# Altium PCB DashDataDisplayPCB.PcbDoc (part 3 of 4)
Units mm, origin at the board's own origin, x right, y up, seen from the top; angles counter-clockwise.
Board outline 152.4 x 101.6 mm, 2 copper layers (Top Layer, Bottom Layer); 143 components, 97 nets, 509 pads, 233 vias.
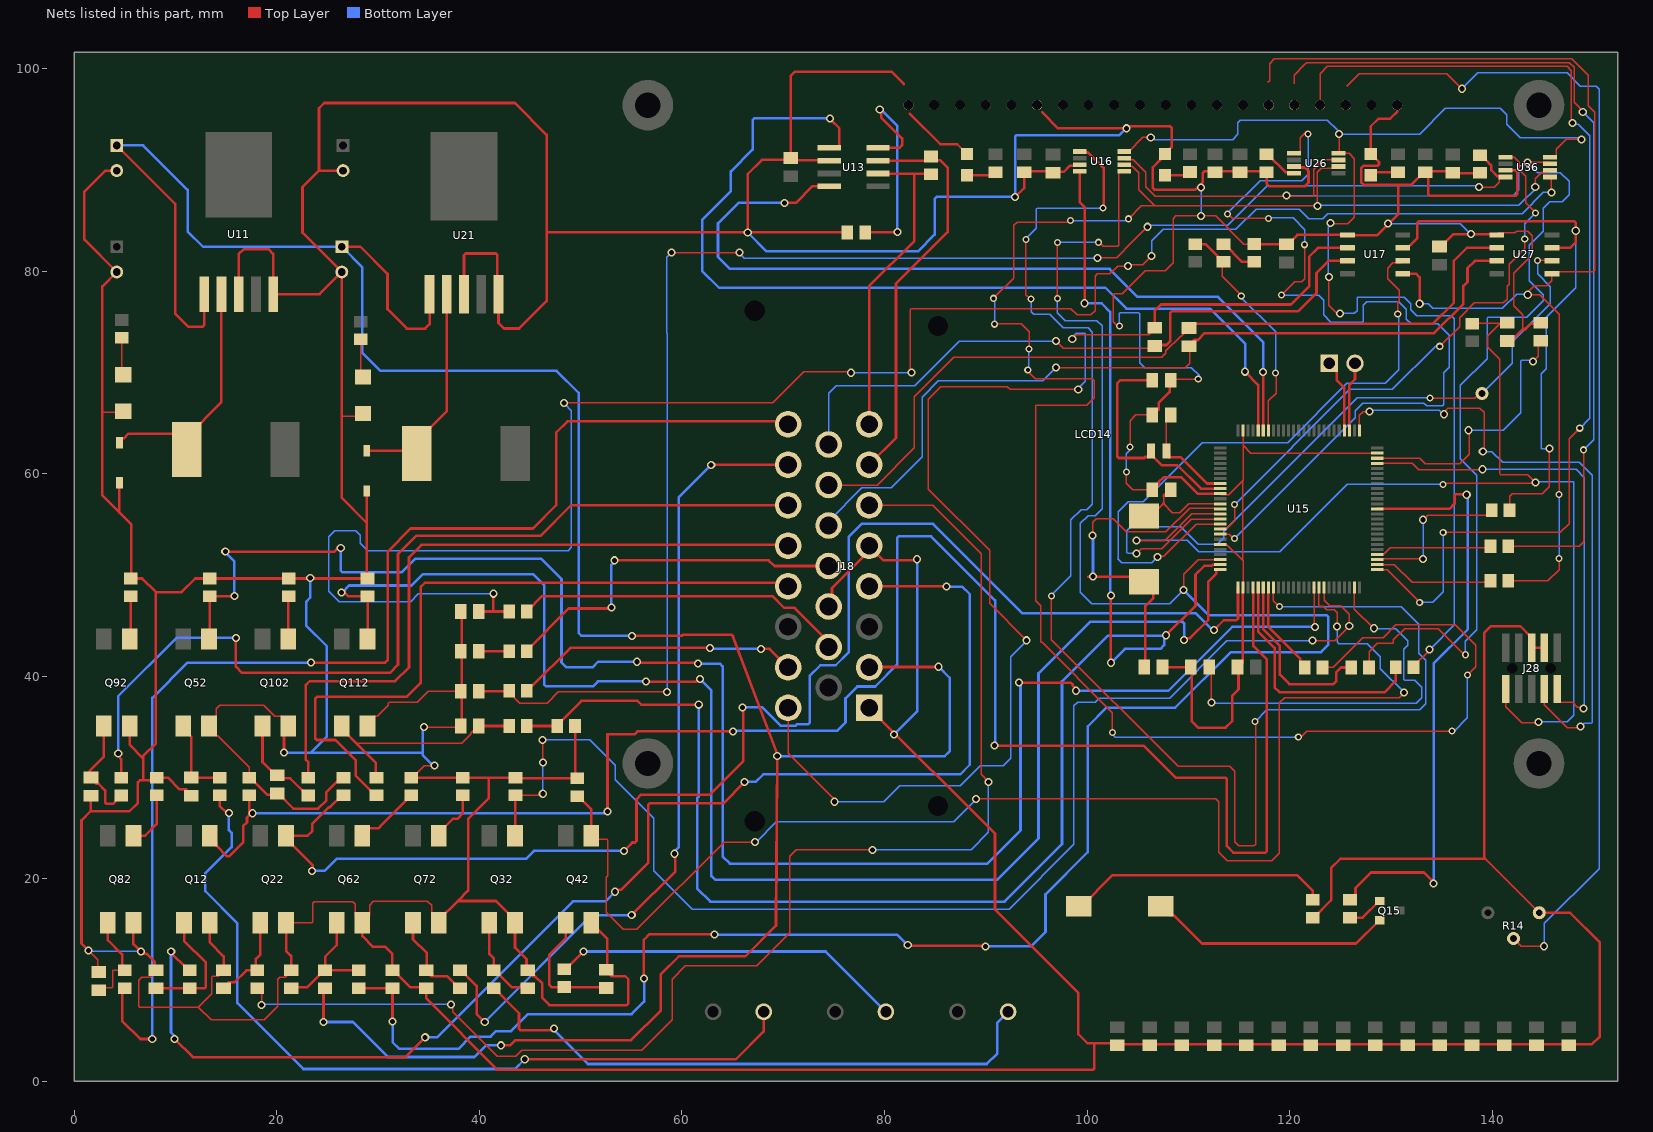
[diagram p2: the nets of this part, all layers, seen from the top]

## Via types
v1: diameter 0.8, hole 0.5, Top Layer to Bottom Layer, 177 vias
v2: diameter 0.7, hole 0.4, Top Layer to Bottom Layer, 55 vias
v3: diameter 1.27, hole 0.711, Top Layer to Bottom Layer, 1 vias

## Nets (pads, with @x,y where several pads share a name; then routed paths per layer and width w, separated by ;. In a path a pad name is that pad's centre, name@x,y a point inside that pad or via, vN(x,y) a via of type N, cw(c..) or ccw(c..) an arc to the next point about the centre after c; other vN are vias at no path point) (continued)
GND: C11.2 C12.1 C13.1 C15.1 C16.1 C17.1 C21.2 C22.1 C25.1 C26.1 C27.2 C31.2 C32.1 C35.2 C36.1 C41.2 C42.1 C45.2 C46.1 C52.1 C55.2 C56.1 C62.1 C65.1 C66.1 C72.1 C75.2 C82.1 C85.1 C92.1 C95.1 C102.1 C105.1 C112.1 C115.1 C122.1 C125.1 C132.1 C135.1 C145.1 C152.1 C155.1 C165.1 C175.1 C185.1 C195.1 C205.1 C215.2 C225.2 C235.1 D11.2 D16.2 D21.2 D26.2 D36.2 J18.1 J18.5 J18.11 J28.3 J28.5 LCD14.1 LCD14.15 LCD14.20 Q12.2 Q22.2 Q32.2 Q42.2 Q52.2 Q62.2 Q72.2 Q82.2 Q92.2 Q102.2 Q112.2 R13.2 R14.3 R45.1 R46.1 R55.1 R56.1 R92.1 R112.1 R122.1 R132.1 R142.1 R152.1 R162.1 R222.1 R252.1 R262.1 R272.1 R282.1 R292.1 U11.3 U11.5 U13.2 U15.10 U15.20 U15.27 U15.74 U15.99 U16.3 U17.1 U21.3 U21.5 U26.3 U27.1 U31.2 U36.3 U41.2 | length 1181.9
  Top Layer w0.127: v1(1.42,12.9) 2.32,12 C102.1@2.32,10.81 ; 2.77,66.05 4.91,66.05 4.94,66.08 4.91,66.08 D11.2@4.83,66.16 ; C12.1@8.069,10.871 7.482,10.284 6.674,10.284 6.37,9.98 6.37,7.394 6.444,7.32 12.26,7.32 ; C22.1@14.74,10.871 14.234,10.364 13.634,10.364 13.56,10.29 13.56,8.62 12.26,7.32 ; R112.1@17.272,29.972 17.272,30.988 14.162,34.098 14.004,34.098 13.293,34.81 Q52.2@13.293,35.07 14.004,35.782 14.004,36.804 14.34,37.14 18.712,37.14 19.795,36.057 20.413,36.057 21.124,35.345 Q102.2@21.124,35.07 ; Q22.2@20.913,15.639 23.439,15.639 23.55,15.75 23.55,17.55 23.71,17.71 27.51,17.71 27.736,17.484 27.736,16.351 Q62.2@28.448,15.639 29.159,16.351 29.159,17.399 29.54,17.78 34.85,17.78 35.272,17.358 35.272,16.351 Q72.2@35.983,15.639 ; C32.1@21.412,10.871 20.826,10.284 20.304,10.284 20.1,10.08 20.1,7.394 18.756,6.05 13.53,6.05 12.26,7.32 ; 26.4,65.67 28.23,65.67 D21.2@28.5,65.94 ; Q112.2@28.956,35.07 28.956,35.345 29.667,36.057 29.937,36.057 30.99,37.11 30.99,37.3 31.13,37.44 33.86,37.44 34.928,38.508 C82.1@38.245,38.508 ; R162.1@33.274,29.972 33.374,29.972 34.572,31.17 v1(35.58,31.17) ; v1(34.54,34.97) 38.136,34.97 C132.1@38.245,35.079 ; v2@103.07,74.51 102.61,74.97 102.61,77.676 102.684,77.75 103.47,77.75 105.77,80.05 107.73,80.05 108.51,80.83 108.51,85.18 108.78,85.45 v1(111.26,85.45) ; v2(103.88,60.17) 103.88,59.06 104.52,58.42 C215.2@106.553,58.42 ; v2(104.25,62.63) 104.25,65.21 104.826,65.786 C55.2@106.553,65.786 ; C45.2@108.153,69.215 108.278,69.34 v2(110.98,69.34) ; v1@111.26,85.46 112.688,85.46 115.482,82.666 R45.1@116.516,82.666 116.616,82.666 R45.1@117.128,83.177 ; U15.20@113.154,53.015 113.238,52.931 113.86,52.931 115.404,51.387 U15.27@115.404,48.765 ; U15.10@113.154,58.015 113.238,57.931 113.86,57.931 113.878,57.913 113.983,57.913 115.404,59.334 115.404,62.79 ; 115.38,51.411 115.38,59.31 ; U15.99@115.404,64.265 115.404,62.79 ; U15.74@128.654,62.015 116.179,62.015 115.404,62.79 ; U27.1@140.462,83.555 140.665,83.758 142.25,83.758 142.415,83.923 143.536,83.923 143.983,83.476 143.983,81.623 142.14,79.78 142.14,76.586 143.046,75.68 143.046,74.277
  Top Layer w0.254: v1(1.42,12.9) 0.71,13.61 0.71,25.75 1.62,26.66 ; C112.1@1.651,28.297 1.62,28.266 1.62,26.66 ; C11.2@4.191,89.916 3.066,89.916 1,87.85 1,83.099 C31.2@4.191,79.908 2.77,78.487 2.77,66.05 2.77,57.85 4.46,56.16 ; U31.2@4.46,59.104 4.46,56.16 ; Q92.2@5.461,35.07 5.461,33.229 6.8,31.89 ; Q82.2@5.842,15.639 5.842,13.538 6.774,12.606 7.114,12.606 7.96,11.76 7.96,10.98 C12.1@8.069,10.871 ; C62.1@11.557,28.297 11.034,28.82 10.406,28.82 9.254,29.972 R262.1@8.128,29.972 7.876,29.72 6.8,29.72 ; Q12.2@13.377,15.639 13.377,13.703 14.74,12.34 C22.1@14.74,10.871 ; U11.3@16.231,77.724 16.231,81.661 16.74,82.17 19.16,82.17 19.634,81.696 U11.5@19.634,77.724 24.232,77.724 C21.2@26.4,79.892 ; R112.1@17.272,29.972 17.372,29.972 19.047,28.297 20.243,28.297 21.62,26.92 24.08,26.92 24.894,27.734 24.894,28.55 26.316,29.972 R122.1@26.416,29.972 ; v1(20.71,32.47) 20.71,34.656 Q102.2@21.124,35.07 ; Q22.2@20.913,15.639 20.913,12.867 21.412,12.368 C32.1@21.412,10.871 ; C41.2@26.543,89.916 24.166,89.916 ; Q62.2@28.448,15.639 28.448,14.322 29.51,13.26 30.71,13.26 31.38,12.59 31.38,11.58 31.4,11.56 31.4,10.966 R92.1@31.42,10.946 31.52,10.946 33.195,9.271 34.756,9.271 34.756,8.174 41.81,1.12 100.571,1.12 100.72,1.269 100.72,3.752 ; U41.2@28.877,58.288 28.877,55.14 ; R162.1@33.374,29.972 R252.1@38.354,29.972 40.94,29.972 ; Q72.2@35.983,15.639 35.983,15.914 37.875,17.805 ; C132.1@38.245,35.079 38.245,38.508 C72.1@38.245,46.382 ; U21.3@38.481,77.699 38.481,81.561 38.65,81.73 41.621,81.73 41.77,81.581 41.77,77.813 U21.5@41.885,77.699 41.885,74.885 42.44,74.33 43.93,74.33 46.64,77.04 46.64,83.81 ; R222.1@49.445,35.079 49.445,30.11 R142.1@49.65,29.905 43.628,29.905 R132.1@43.561,29.972 40.94,29.972 ; Q42.2@51.054,15.639 52.64,14.053 52.64,11.03 52.52,10.91 53.043,10.387 54.403,10.387 54.7,10.09 54.7,7.669 54.551,7.52 46.92,7.52 46.209,8.231 46.209,9.637 45.499,10.348 45.286,10.348 44.65,10.984 44.65,12.07 43.519,13.201 Q32.2@43.519,15.639 43.519,15.914 41.633,17.8 37.88,17.8 37.875,17.805 ; v1(66.5,83.82) 66.5,89.58 67.89,90.97 70.647,90.97 C13.1@70.739,91.062 ; J18.11@74.483,46.873 74.818,47.208 74.818,48.706 78.483,52.371 J18.5@78.483,52.873 79.916,51.44 83.11,51.44 v1(83.21,51.54) ; U13.2@74.549,90.897 74.496,90.95 70.851,90.95 C13.1@70.739,91.062 ; R13.2@76.335,83.81 46.64,83.81 ; J18.1@78.483,36.873 90.915,24.441 90.915,16.965 99.15,8.73 99.15,4.64 100.038,3.752 100.72,3.752 ; 81.92,98.46 80.69,99.69 71.18,99.69 70.739,99.249 C13.1@70.739,91.062 ; 82.51,95.52 85.51,92.52 87.184,92.52 D16.2@88.138,91.566 ; v1(92.9,87.3) 93.801,88.201 93.801,89.843 96.594,89.843 96.632,89.805 97.713,89.805 98.315,90.407 99.181,90.407 U16.3@99.276,90.501 ; 95.59,95.66 97.153,94.097 v1@104.062,94.097 ; v1@104.259,94.294 108.207,94.294 108.356,94.145 108.356,92.226 107.223,91.093 107.223,90.963 106.51,90.25 106.51,88.189 106.659,88.04 110.7,88.04 111.44,88.78 111.44,89.694 111.589,89.843 117.654,89.843 R46.1@117.729,89.768 117.729,88.641 117.99,88.38 121.52,88.38 121.87,88.73 121.87,89.87 121.516,90.224 120.542,90.224 U26.3@120.448,90.318 ; C215.2@106.553,58.42 107.076,58.943 107.076,59.155 107.581,59.66 109.3,59.66 110.96,58 U15.10@112.597,58 ; C55.2@106.553,65.786 107.076,66.309 107.076,66.962 108.153,68.039 C45.2@108.153,69.215 ; C225.2@107.353,40.894 110.353,40.894 110.353,35.537 110.975,34.915 113.695,34.915 114.324,35.544 114.324,38.054 114.953,38.683 114.953,40.894 115.39,41.331 U15.27@115.39,48.43 ; R45.1@116.616,82.666 119.564,82.666 119.691,82.539 119.741,82.539 120.772,83.57 125.715,83.57 U17.1@125.73,83.555 128.675,83.555 130.71,85.59 130.71,88.489 130.66,88.539 ; R55.1@122.29,16.16 122.39,16.16 124.1,17.87 124.1,21.05 125.02,21.97 139.22,21.97 ; 130.64,95.76 129.918,95.038 128.758,95.038 128.016,94.296 D36.2@128.016,91.566 128.83,90.752 128.83,90.542 128.681,90.393 127.281,90.393 127.089,90.201 127.089,88.731 127.281,88.539 130.66,88.539 ; C27.2@134.804,82.323 134.854,82.323 136.151,83.62 140.397,83.62 U27.1@140.462,83.555 ; R56.1@138.804,89.701 138.804,89.641 136.271,89.641 136.069,89.843 C36.1@133.41,89.843 ; C235.1@140.843,73.155 141.924,73.155 143.046,74.277 143.307,74.277 143.83,74.8 144.7,74.8 C35.2@144.8,74.9 ; U36.3@141.313,89.937 142.311,89.937 142.46,89.788 142.46,87.569 142.311,87.42 133.856,87.42 133.708,87.569 133.708,89.545 C36.1@133.41,89.843 ; J28.3@145.161,42.802 J28.5@143.891,42.802 143.891,43.827 142.778,44.94 139.9,44.94 139.22,44.26 139.22,21.97 ; 1.62,26.66 5.44,26.66 6.27,27.49 6.27,29.5 6.49,29.72 6.8,29.72 ; 4.46,56.16 5.63,54.99 5.63,49.685 R272.1@5.588,49.643 6.697,49.643 8.05,48.29 ; 6.8,29.72 6.8,31.89 ; 6.8,31.89 6.8,32.1 8.05,33.35 8.05,48.29 ; 8.05,48.29 10.59,48.29 11.943,49.643 R152.1@13.377,49.643 R282.1@21.167,49.643 R292.1@28.956,49.643 28.877,49.722 28.877,55.14 ; 24.166,89.916 24.166,96.076 24.68,96.59 43.5,96.59 46.64,93.45 46.64,83.81 ; 24.166,89.916 22.53,88.28 22.53,83.794 C21.2@26.416,79.908 C21.2@26.4,79.892 ; C21.2@26.4,79.892 26.4,65.67 26.4,57.617 28.877,55.14 ; 37.875,17.805 38.88,18.811 38.88,25.91 40.94,27.97 40.94,29.972 ; 100.72,3.752 102.84,3.752 102.947,3.645 149.835,3.645 150.63,4.44 150.63,13.71 147.703,16.637 R14.3@144.653,16.637 139.32,21.97 139.22,21.97 ; 130.66,88.539 132.056,88.539 133.36,89.843 C36.1@133.41,89.843
  Bottom Layer w0.127: v1(1.42,12.9) 1.47,12.85 6.53,12.85 v1(6.58,12.8) ; v2(103.2,74.56) 103.2,75.796 103.298,75.893 105.077,75.893 105.21,75.76 105.21,70.95 105.69,70.47 110.3,70.47 111.08,69.69 v2@111.08,69.16 ; v2(103.88,60.17) 103.88,61.95 104.19,62.26 v2@104.19,62.62 ; v1(111.26,85.45) v1(111.26,88.26) ; v1(129.7,84.69) 136.86,84.69 v1(137.9,83.65)
  Bottom Layer w0.254: v1@20.62,32.42 23.34,32.42 ; v1(23.3,49.68) 23.3,47.75 22.89,47.34 22.89,45 24.94,42.95 24.94,34.02 23.34,32.42 ; v1@34.59,34.98 34.39,34.78 34.39,32.42 ; v1@35.5,31.09 34.39,32.2 34.39,32.42 ; v1(66.5,83.82) 68.37,81.95 83.31,81.95 84.96,83.6 84.96,87.13 85.15,87.32 v1@92.9,87.32 ; v1(80.92,34.22) 83.23,36.53 83.23,51.52 v1(83.21,51.54) ; v1(92.9,87.3) v1@92.9,87.32 ; v1(103.914,94.097) 103.867,94.097 103.19,93.42 93.049,93.42 92.9,93.271 v1@92.9,87.32 ; 23.34,32.42 34.39,32.42
NetC12_2: C12.2 Q12.1 R12.2 | length 12.2
  Top Layer w0.254: C12.2@8.069,9.271 8.144,9.196 R12.2@11.405,9.196 11.431,9.17 12.841,9.17 12.99,9.319 12.99,11.71 10.837,13.863 Q12.1@10.837,15.639
NetC22_2: C22.2 Q22.1 R22.2 | length 9
  Top Layer w0.254: C22.2@14.74,9.271 15.263,9.794 15.845,9.794 16.997,10.946 R22.2@18.076,10.946 17.92,11.102 17.92,12.08 18.373,12.533 Q22.1@18.373,15.639
NetC32_2: C32.2 Q62.1 R32.2 R102.2 | length 12.5
  Top Layer w0.254: C32.2@21.412,9.271 22.973,9.271 24.648,10.946 R32.2@24.748,10.946 ; Q62.1@25.908,15.639 25.908,13.428 24.78,12.3 24.78,10.978 R32.2@24.748,10.946 ; R102.2@28.084,10.946 R32.2@24.748,10.946
NetC35_1: C35.1 U15.73 | length 26.7
  Top Layer w0.127: U15.73@128.654,61.515 132.855,61.515 133.42,60.95 136.78,60.95 137.76,61.93 137.76,64.207 v1(137.687,64.28) ; v1(144.05,71.08) 144.57,71.6 144.57,72.87 C35.1@144.8,73.1
  Bottom Layer w0.127: v1(137.687,64.28) 141.1,64.28 142.84,66.02 142.84,71.096 142.914,71.17 143.96,71.17 v1(144.05,71.08)
NetC37_1: C37.1 J18.16 U17.2 | length 127.1
  Top Layer w0.127: J18.16@70.483,36.873 70.483,32.397 v1@75.25,27.63 ; v1(94.02,43.54) 90.37,47.19 90.37,52.44 84.34,58.47 84.34,67.35 85.58,68.59 92.129,68.59 92.399,68.32 v1(99.13,68.32) ; v1(98.54,73.29) 98.958,73.708 106.093,73.708 C37.1@106.68,74.295
  Top Layer w0.254: C37.1@106.68,74.295 106.68,76.06 107.316,76.696 120.136,76.696 121.93,78.49 121.93,81.41 122.805,82.285 U17.2@125.73,82.285
  Bottom Layer w0.127: v1(75.05,27.6) 79.92,27.6 81.5,29.18 87.5,29.18 89.48,31.16 91.74,31.16 92.457,31.877 92.457,41.916 v1@94.1,43.56 ; v1(98.54,73.29) 98.54,73.47 98.93,73.86 99.756,73.86 99.83,73.786 99.83,69.124 99.13,68.424 v1(99.13,68.32)
NetC37_2: C37.2 J18.15 U17.3 | length 65.1
  Top Layer w0.127: v1(96.94,73.08) 97.66,72.36 106.345,72.36 C37.2@106.68,72.695
  Top Layer w0.254: C37.2@106.68,72.695 107.825,72.695 108.233,73.103 108.233,75.884 108.382,76.033 120.873,76.033 122.66,77.82 122.66,79.81 123.865,81.015 U17.3@125.73,81.015
  Bottom Layer w0.127: J18.15@74.483,62.873 74.483,67.913 75.26,68.69 82.98,68.69 87.37,73.08 v1(96.94,73.08)
NetC42_2: C42.2 Q32.1 R42.2 | length 8.9
  Top Layer w0.254: Q32.1@40.979,15.639 40.979,12.551 41.427,12.103 R42.2@41.427,10.946 41.527,10.946 43.202,9.271 C42.2@44.763,9.271
NetC45_1: C45.1 U15.9 Y15.1 | length 23.4
  Top Layer w0.254: C45.1@106.553,69.215 103.275,69.215 102.99,68.93 102.99,61.689 103.139,61.54 105.638,61.54 105.738,61.64 106.055,61.64 106.328,61.913 Y15.1@106.328,62.23 106.328,61.88 107.368,60.84 108.91,60.84 111.235,58.515 U15.9@113.154,58.515
NetC47_1: C47.1 J18.13 U27.3 | length 83.5
  Top Layer w0.127: v1(96.92,70.46) 96.94,70.44 109.68,70.44 110.12,70.88 110.12,72.61 C47.1@110.06,72.67
  Top Layer w0.254: C47.1@110.06,72.67 110.583,73.193 110.943,73.193 111.61,73.86 134.26,73.86 137.16,76.76 137.16,78.52 137.57,78.93 137.57,80.29 138.295,81.015 U27.3@140.462,81.015
  Bottom Layer w0.127: J18.13@74.483,54.873 74.483,55.286 77.776,58.579 80.661,58.579 83.73,61.648 83.73,67.55 85.33,69.15 95.61,69.15 v1(96.92,70.46)
NetC47_2: C47.2 J18.14 U27.2 | length 81.2
  Top Layer w0.127: J18.14@74.483,58.873 79.273,58.873 82.94,62.54 82.94,67.58 86.85,71.49 107.386,71.49 107.78,71.884 107.78,72.113 109.251,73.584 109.324,73.584 110.01,74.27 C47.2@110.06,74.27
  Top Layer w0.254: C47.2@110.06,74.27 110.57,74.78 134.13,74.78 136.21,76.86 136.21,81 137.495,82.285 U27.2@140.462,82.285
NetC52_2: C52.2 Q42.1 R52.2 | length 12.5
  Top Layer w0.254: Q42.1@48.514,15.639 48.514,14.104 46.88,12.47 46.88,9.54 47.121,9.299 R52.2@48.387,9.299 52.509,9.299 C52.2@52.52,9.31
NetC55_1: C55.1 U15.8 Y15.2 | length 9.9
  Top Layer w0.127: Y15.2@107.828,62.23 107.828,65.461 C55.1@108.153,65.786
  Top Layer w0.254: Y15.2@107.828,62.23 107.828,62.173 108.101,61.9 108.101,61.607 109.273,61.607 111.857,59.023 112.53,59.023
NetC62_2: C62.2 Q52.1 R62.2 | length 8.3
  Top Layer w0.254: Q52.1@10.753,35.07 10.753,34.795 11.557,33.991 11.557,29.897 11.632,29.972 R62.2@14.351,29.972
NetC72_2: C72.2 R72.2 U36.5 | length 182.5
  Top Layer w0.127: v1(48.34,66.98) 68.96,66.98 72.04,70.06 76.49,70.06 v1@76.55,70 ; v1@82.65,69.96 82.56,70.05 82.56,76.216 82.634,76.29 98.41,76.29 99.03,75.67 100.38,75.67 100.8,76.09 100.8,79.5 101.02,79.72 102.25,79.72 103.01,80.48 v1(104.06,80.48) ; v1@104.13,80.64 105.52,80.64 v1(106.36,81.48) ; U36.5@145.707,89.287 145.86,89.134 v1(145.86,87.77)
  Top Layer w0.254: C72.2@39.845,46.382 41.371,46.382 ; v1@41.37,48.02 41.371,48.019 41.371,46.382 ; R72.2@42.932,46.382 41.371,46.382
  Bottom Layer w0.127: v1(41.39,48.14) 33.972,48.14 33.202,47.37 26.14,47.37 25.14,48.37 25.14,53.74 25.74,54.34 27.79,54.34 28.24,53.89 28.24,53.12 28.97,52.39 48.76,52.39 49.09,52.72 49.09,66.23 v1@48.42,66.9 ; v1(76.7,69.96) 76.72,69.98 82.63,69.98 v1(82.65,70) ; v1@106.38,81.61 106.37,81.62 106.37,82.97 107.516,84.116 114.696,84.116 116.7,86.12 120.95,86.12 121.9,85.17 123.26,85.17 123.75,85.66 142.96,85.66 145.07,87.77 v1(145.86,87.77)
NetC75_1: C75.1 U15.49 | length 40.5
  Top Layer w0.127: C75.1@111.953,40.894 112.28,40.567 v1(112.28,37.4) v1@112.28,37.31 ; U15.49@126.404,48.765 126.404,46.626 128.35,44.68 v1@128.43,44.68
  Bottom Layer w0.127: v1(112.28,37.4) 112.37,37.31 132.5,37.31 133.05,37.86 133.05,38.9 132.36,39.59 131.364,39.59 131.29,39.664 131.29,42.67 131.66,43.04 131.66,43.51 130.5,44.67 v1@128.5,44.67
  other v1: 128.32,44.73
NetC82_2: C82.2 R56.2 R82.2 U36.4 | length 153
  Top Layer w0.127: R82.2@42.932,38.508 42.932,38.408 44.001,37.34 46.7,37.34 47.797,38.437 v1(58.53,38.437) ; v1(58.97,81.83) v1(65.67,81.83) ; v1@101.22,81.32 102.93,81.32 104.489,82.879 104.489,82.892 v1(105.967,84.37) ; v1(138.7,88.297) 138.737,88.26 140.2,88.26 140.691,88.751 140.691,89.122 140.856,89.287 U36.4@141.313,89.287
  Top Layer w0.254: C82.2@39.845,38.508 R82.2@42.932,38.508 ; R56.2@138.804,91.451 138.904,91.451 139.652,90.703 139.652,90.69 139.922,90.42 139.922,89.951 140.492,89.381 141.218,89.381 U36.4@141.313,89.287
  Bottom Layer w0.127: v1(58.53,38.437) 58.53,73.86 58.51,73.88 58.51,81.34 v1@58.97,81.8 ; v1(65.67,81.83) 65.67,81.74 66.14,81.27 v1(101.05,81.27) ; v1(105.967,84.37) 106.096,84.499 106.377,84.499 106.378,84.5 113.897,84.5 117.819,88.421 138.576,88.421 v1(138.7,88.297)
NetC92_2: C92.2 Q72.1 R172.2 | length 9.4
  Top Layer w0.254: Q72.1@33.443,15.639 33.443,14.017 34.82,12.64 34.82,10.935 34.756,10.871 35.279,10.348 36.84,10.348 37.992,9.196 R172.2@38.092,9.196
NetC102_2: C102.2 Q82.1 R182.2 | length 10
  Top Layer w0.127: C102.2@2.32,9.21 2.36,9.25 3.68,9.25 3.776,9.346 3.776,10.946 R182.2@4.733,10.946
  Top Layer w0.254: C102.2@1.881,8.764 C102.2@2.324,9.206 ; Q82.1@3.302,15.639 3.302,13.948 4.733,12.517 R182.2@4.733,10.946
NetC112_2: C112.2 Q92.1 R192.2 | length 11
  Top Layer w0.254: Q92.1@2.921,35.07 2.921,32.071 1.505,30.655 1.505,30.043 1.651,29.897 2.174,29.374 2.386,29.374 3.05,28.71 3.05,27.529 3.199,27.38 3.815,27.38 4.102,27.667 4.102,27.767 4.55,28.215 R192.2@4.65,28.215
NetC122_2: C122.2 Q102.1 R202.2 | length 9.5
  Top Layer w0.254: Q102.1@18.584,35.07 18.584,31.506 19.62,30.47 19.62,30.42 20.143,29.897 20.193,29.897 21.323,29.897 23.01,28.21 R202.2@23.11,28.21
NetC132_2: C132.2 Q112.1 R212.2 R232.2 | length 22.4
  Top Layer w0.127: 27.855,33.355 38.244,33.355 39.158,34.27 39.158,34.342 39.845,35.029 C132.2@39.845,35.079
  Top Layer w0.254: Q112.1@26.416,35.07 26.416,34.795 27.855,33.355 29.77,31.441 29.77,30.047 R212.2@29.845,29.972 ; C132.2@39.845,35.079 R232.2@42.932,35.079
NetC152_2: C152.2 R302.2 | length 3.1
  Top Layer w0.254: C152.2@39.845,42.445 R302.2@42.932,42.445
NetC215_1: C215.1 U15.12 Y25.1 | length 9.8
  Top Layer w0.127: Y25.1@106.807,56.289 107.541,57.023 ; 107.56,57.005 108.425,56.14 109.162,56.14 110.037,57.015 U15.12@113.154,57.015 ; 107.56,57.112 107.56,57.777
  Top Layer w0.254: 107.56,57.005 107.56,57.112 ; 107.56,57.777 108.153,58.37 108.153,58.42 107.63,57.897
NetC225_1: C225.1 U15.13 Y25.2 | length 34.2
  Top Layer w0.127: v1(100.55,53.9) 100.55,55.2 100.89,55.54 102.572,55.54 103.862,54.25 107.782,54.25 110.131,56.599 112.621,56.599 112.705,56.515 U15.13@113.154,56.515
  Top Layer w0.254: 100.1,49.82 v1(100.59,49.82) 104.921,49.82 106.544,48.197 106.544,47.734 105.753,46.943 C225.1@105.753,40.894
  Bottom Layer w0.254: v1(100.59,49.82) v1@100.59,53.71
NetC235_2: C235.2 J28.10 R35.1 U15.14 | length 112.4
  Top Layer w0.127: v1(104.87,53.4) 104.9,53.37 107.69,53.37 110.335,56.015 U15.14@113.154,56.015 ; v2(135.16,58.93) 135.255,59.025 144.205,59.025 v1(144.3,59.12) 143.51,59.91 140.814,59.91 140.74,59.984 140.74,71.31 139.59,72.46 139.59,73.625 140.756,74.79 ; R35.1@138.049,74.803 138.106,74.86 C235.2@141.411,74.86 ; 140.756,74.803 C235.2@141.411,74.803 ; J28.10@141.351,38.732 141.351,36.969 142.91,35.41 v1@144.53,35.41 ; C235.2@141.42,74.812 C235.2@141.503,74.895
  Bottom Layer w0.127: v1(104.87,53.4) 104.88,53.41 109.89,53.41 111.016,52.284 119.03,52.284 125.706,58.96 v2@135.19,58.96 ; v1@144.06,59.2 148.006,59.2 148.08,59.126 148.08,36.14 147.42,35.48 v1(144.57,35.48)
NetD11_1: D11.1 R11.1 | length 3.7
  Top Layer w0.127: R11.1@4.67,73.41 4.67,69.92 D11.1@4.83,69.76
NetD16_1: D16.1 R16.1 | length 3
  Top Layer w0.254: D16.1@88.138,89.466 90.667,89.466 R16.1@90.969,89.768
NetD21_1: D21.1 R21.1 | length 3.8
  Top Layer w0.127: R21.1@28.28,73.26 28.28,69.76 D21.1@28.5,69.54
NetD26_1: D26.1 R26.1 | length 2.6
  Top Layer w0.254: D26.1@107.696,89.466 109.848,89.466 R26.1@110.164,89.782
NetD36_1: D36.1 R36.1 | length 2.8
  Top Layer w0.254: D36.1@128.016,89.466 128.318,89.768 R36.1@130.713,89.768
NetJ18_4: J18.4 R12.1 | length 133.1
  Top Layer w0.254: v1@9.28,12.93 9.321,12.93 11.305,10.946 R12.1@11.405,10.946 ; v1(9.91,4.18) 11.71,2.38 32.69,2.38 v1(34.65,4.34) ; v1(53.41,18.71) 53.604,18.904 54.004,18.904 56.67,21.57 56.67,27.291 56.819,27.44 64.09,27.44 v1(66.19,29.54) ; J18.4@78.483,48.873 v1@86.027,48.873
  Bottom Layer w0.254: v1(9.57,12.82) 9.55,12.8 9.55,4.815 9.806,4.559 9.806,4.284 v1(9.91,4.18) ; v1(34.65,4.34) 35.82,4.34 49.24,17.76 52.46,17.76 v1(53.41,18.71) ; v1@66.41,29.56 67.28,29.56 68.03,30.31 87.48,30.31 88.42,31.25 88.42,48.09 87.67,48.84 v1(86.14,48.84)
NetJ18_6: J18.6 R22.1 | length 133
  Top Layer w0.127: R22.1@18.076,9.196 18.5,8.772 v1(18.5,7.54) ; v1@37.36,7.64 37.36,6.85 41.763,2.447 43.606,2.447 44.2,3.04 56.03,3.04 59.05,6.06 59.05,10.08 60.35,11.38 67.39,11.38 70.66,14.65 70.66,22.22 71.29,22.85 v1(78.83,22.85) ; J18.6@78.483,56.873 84.747,56.873 89.54,52.08 89.54,30.29 v1(90.27,29.56) 90.39,29.56 v1@90.52,29.43
  Bottom Layer w0.127: v1@18.5,7.59 v1(37.21,7.59) ; v1@79.02,22.87 88.57,22.87 90.27,24.57 v1(90.27,29.56)
NetJ18_7: J18.7 R23.2 U13.7 | length 40
  Top Layer w0.254: J18.7@78.483,60.873 81.14,63.53 81.14,78.76 86.23,83.85 86.23,90.21 85.497,90.943 84.957,90.943 R23.2@84.59,91.31 84.177,90.897 U13.7@79.375,90.897
NetJ18_8: J18.8 R23.1 U13.6 | length 31.8
  Top Layer w0.254: J18.8@78.483,64.873 78.483,78.503 82.92,82.94 82.92,89.627 ; U13.6@79.375,89.627 82.92,89.627 ; R23.1@84.59,89.56 84.523,89.627 82.92,89.627
NetJ18_10: J18.10 R72.1 | length 32.8
  Top Layer w0.254: R72.1@44.682,46.382 46.2,47.9 68.954,47.9 70.103,46.751 71.108,46.751 71.167,46.692 74.483,43.375 J18.10@74.483,42.873
NetJ18_12: J18.12 R302.1 | length 35.9
  Top Layer w0.254: R302.1@44.682,42.445 44.682,42.545 48.817,46.68 v1@52.667,46.68 ; v1(53.34,51.44) 68.57,51.44 69.137,50.873 J18.12@74.483,50.873
  Bottom Layer w0.254: v1(53.04,46.79) 53.04,50.992 53.34,51.292 v1(53.34,51.44)
NetJ18_17: J18.17 R82.1 | length 28.4
  Top Layer w0.254: R82.1@44.682,38.508 44.682,38.608 45.13,39.056 45.23,39.056 48.974,42.8 62.74,42.8 v1(62.78,42.76) ; v1(67.79,42.69) 68.666,42.69 J18.17@70.483,40.873
  Bottom Layer w0.254: v1(62.78,42.76) 62.815,42.725 67.755,42.725 v1(67.79,42.69)
NetJ18_19: J18.19 R212.1 | length 70.3
  Top Layer w0.254: R212.1@29.845,28.222 29.745,28.222 27.81,30.157 27.81,31.67 25.787,33.693 23.944,33.693 23.795,33.842 23.795,37.801 23.944,37.95 32.82,37.95 34.19,39.32 34.19,48.8 34.61,49.22 70.136,49.22 J18.19@70.483,48.873
NetJ18_20: J18.20 R202.1 | length 69
  Top Layer w0.254: R202.1@23.11,29.96 23.11,31.5 22.874,31.736 22.874,39.124 23.25,39.5 31.69,39.5 33.05,40.86 33.05,51.73 34.28,52.96 57.147,52.96 57.159,52.971 70.385,52.971 J18.20@70.483,52.873
NetJ18_21: J18.21 R192.1 | length 92.5
  Top Layer w0.254: 4.555,31.885 4.65,31.79 R192.1@4.65,29.965 ; v1(15.95,43.77) 15.95,40.93 16.556,40.324 31.155,40.324 31.96,41.129 31.96,52.07 33.75,53.86 46.05,53.86 49.063,56.873 J18.21@70.483,56.873
  Bottom Layer w0.254: v1(4.34,32.35) 4.34,38.03 10.12,43.81 v1@15.93,43.81
NetJ18_22: J18.22 R172.1 | length 80.6
  Top Layer w0.254: R172.1@38.092,10.946 38.192,10.946 39.72,9.418 39.72,6.646 40.526,5.84 v1(40.53,5.84) ; v1(55.04,16.4) 59.36,20.72 v1@59.36,22.52 ; v1(62.89,60.86) 62.897,60.867 70.477,60.867 J18.22@70.483,60.873
  Bottom Layer w0.254: v1(40.53,5.84) 51.09,16.4 55.01,16.4 v1@55.1,16.31 ; v1(59.25,22.46) 59.25,22.667 59.7,23.117 59.7,57.67 v1(62.89,60.86)
NetJ18_23: J18.23 R182.1 | length 125.3
  Top Layer w0.254: R182.1@4.733,9.196 4.733,5.967 6.53,4.17 v1@7.66,4.17 ; v1(23.38,41.34) 30.701,41.34 30.97,41.609 30.97,52.33 33.22,54.58 45.29,54.58 47.59,56.88 47.59,64.06 48.68,65.15 70.206,65.15 J18.23@70.483,64.873
  Bottom Layer w0.254: v1(7.7,4.17) 7.7,37.86 11.18,41.34 v1(23.38,41.34)
NetJ28_2: J28.2 U15.72 | length 48.2
  Top Layer w0.127: U15.72@128.654,61.015 132.125,61.015 132.77,60.37 139.35,60.37 v1@139.38,60.4 ; J28.2@146.431,38.732 146.431,37.707 146.738,37.4 147.94,37.4 148.426,36.914 148.923,36.914 v1(149.017,36.82)
  Bottom Layer w0.127: v1(139.05,60.43) 148.29,60.43 149.12,59.6 149.12,36.923 v1(149.017,36.82)
NetJ28_4: J28.4 U15.76 | length 62.8
  Top Layer w0.127: U15.76@126.904,64.265 126.904,65.741 127.283,66.12 v1(127.89,66.12) ; v1(135.24,65.86) 135.24,66.042 135.496,66.298 135.496,66.349 135.586,66.439 135.68,66.439 135.691,66.45 138.8,66.45 139.2,66.05 v1@139.2,62.174 ; v1@139.19,61.91 v1@139.2,61.92 ; J28.4@145.161,38.732 145.161,37.189 147.427,34.923 v1@148.601,34.923 ; v1@139.2,61.92 139.079,62.041 v1(139.079,62.174) v1@139.2,62.174 ; v1@139.2,61.92 v1@139.2,62.174
  Bottom Layer w0.127: v1(127.89,66.12) 128.01,66.24 134.785,66.24 135.165,65.86 v1(135.24,65.86) ; v1(139.079,62.174) 139.976,62.174 141.04,61.11 148.62,61.11 149.88,59.85 149.88,35.404 149.806,35.33 149.1,35.33 v1@148.68,34.91
  other v1: 148.71,35.01
NetJ38_1: J38.1 U15.79 | length 6.7
  Top Layer w0.254: J38.1@123.92,70.89 124.656,70.155 124.656,69.254 125.396,68.514 U15.79@125.396,64.83
NetJ38_2: J38.2 U15.78 | length 6.9
  Top Layer w0.254: U15.78@125.904,64.265 125.904,68.76 126.46,69.316 J38.2@126.46,70.89
NetL11_1: L11.1 U11.2 U31.1 | length 24.4
  Top Layer w0.254: U31.1@4.46,63.056 4.46,63.284 4.663,63.488 4.892,63.488 5.324,63.92 9.787,63.92 L11.1@11.11,62.597 ; L11.1@11.11,62.38 L11.1@11.11,62.597 ; U11.2@14.529,77.724 14.529,67.049 11.11,63.63 L11.1@11.11,62.597
NetL21_1: L21.1 U21.2 U41.1 | length 22
  Top Layer w0.254: U41.1@28.877,62.24 33.57,62.24 L21.1@33.83,61.98 33.83,63.23 36.779,66.179 U21.2@36.779,77.699
NetLCD14_3: LCD14.3 R14.2 | length 117.6
  Top Layer w0.127: 125.64,98.24 126.88,99.48 135.54,99.48 v1(137.02,98) ; R14.2@142.113,14.097 142.88,13.33 v1(145.14,13.33)
  Bottom Layer w0.127: v1(137.02,98) 138.59,99.57 147.4,99.57 148.71,98.26 150.26,98.26 150.56,97.96 150.56,21 145.14,15.58 v1(145.14,13.33)
NetLCD14_4: LCD14.4 U15.51 | length 102.1
  Top Layer w0.127: LCD14.4@123.01,96.38 123.01,99.49 123.72,100.2 147.4,100.2 147.836,99.764 147.836,94.704 v1(147.94,94.6) ; U15.51@128.654,50.515 129.635,50.515 v2@132.999,47.151 ; v2@135.24,54.1 135.34,54.2 146.75,54.2 147.61,55.06 147.61,63.44 v2(148.65,64.48)
  Bottom Layer w0.127: v2@132.99,47.32 134.15,47.32 135.17,48.34 v2(135.17,54.19) ; v1(147.94,94.6) 148.069,94.471 148.519,94.471 149.653,93.337 149.653,65.453 v2@148.53,64.33
  other v2: 132.85,47.29
NetLCD14_5: LCD14.5 R125.1 | length 85.2
  Top Layer w0.127: 120.46,98.49 120.46,99.35 121.47,100.36 121.47,100.37 121.68,100.58 147.61,100.58 148.09,100.1 148.09,96.65 v1@149.19,95.55 ; R125.1@141.591,52.832 141.603,52.82 148.58,52.82 149.03,53.27 v2(149.03,62.35)
  Bottom Layer w0.127: v1(148.95,95.72) 150.04,94.63 150.04,63.36 v2(149.03,62.35)
NetLCD14_6: LCD14.6 R115.1 U17.5 U27.5 | length 112.5
  Top Layer w0.127: 117.86,98.63 118.02,98.79 118.02,100.45 118.51,100.94 147.87,100.94 149.48,99.33 149.48,96.34 150.15,95.67 150.15,80.084 150.014,79.948 146.113,79.948 U27.5@145.91,79.745 145.91,79.06 145.41,78.56 144.16,78.56 143.649,78.049 143.649,77.789 v1(143.52,77.66) 144.69,77.66 146.61,75.74 v2(146.61,57.92) ; R115.1@141.591,49.403 145.493,49.403 146.61,50.52 146.61,51.49 v2@146.6,51.5
  Top Layer w0.254: U17.5@131.178,79.745 132.475,79.745 132.85,79.37 v1@132.85,76.86 ; v1@132.746,76.756 v1@132.85,76.86 ; v1(132.85,76.773) v1@132.85,76.86
  Bottom Layer w0.127: v1(132.85,76.773) 133.695,76.773 134.148,76.32 141.02,76.32 142.43,77.73 143.45,77.73 v1(143.52,77.66) ; v2(146.61,51.6) v2(146.61,57.92) v2@146.61,57.95
NetLS15_+: LS15.+ Q15.2 | length 24.1
  Top Layer w0.254: LS15.+@107.287,17.272 108.16,16.399 108.551,16.399 111.35,13.6 126.561,13.6 128.853,15.892 Q15.2@128.903,15.892
NetLS15_-: LS15.- R55.2 | length 25.9
  Top Layer w0.254: LS15.-@99.187,17.272 99.437,17.272 102.525,20.36 120.72,20.36 122.29,18.79 R55.2@122.29,17.91
NetQ12_3: Q12.3 R112.2 U15.29 | length 186.2
  Top Layer w0.254: Q12.3@13.377,24.239 14.025,23.591 14.025,23.255 15.081,22.199 15.291,22.199 16.68,23.588 16.68,25.185 17.054,25.559 17.054,26.024 17.272,26.242 R112.2@17.272,28.222 ; v1(52.65,26.64) 52.65,34.25 55.318,34.25 55.608,34.54 v1(65.04,34.54) ; v1(90.86,33.14) 105.59,33.14 108.75,29.98 113.651,29.98 113.8,29.831 113.8,23.21 114.45,22.56 117.601,22.56 117.75,22.709 117.75,41.648 116.42,42.978 U15.29@116.42,48.399
  Bottom Layer w0.254: v1@17.61,26.47 52.332,26.47 52.502,26.64 v1(52.65,26.64) ; v1(65.04,34.54) 65.095,34.595 71.426,34.595 71.431,34.6 75.32,34.6 76.151,35.431 76.151,37.812 77.315,38.976 79.088,38.976 81.25,41.138 81.25,53.651 81.399,53.8 84.6,53.8 90.92,47.48 v1@90.92,33.01
  other v1: 17.6,26.46
NetQ15_1: Q15.1 R65.1 | length 3.6
  Top Layer w0.254: R65.1@125.96,16.16 127.221,16.16 128.853,17.792 Q15.1@128.903,17.792
NetQ22_3: Q22.3 R122.2 U15.26 | length 142.1
  Top Layer w0.254: v1@23.54,20.68 23.54,21.337 20.913,23.964 Q22.3@20.913,24.239 23.029,24.239 23.51,24.72 23.51,25.44 25.13,27.06 25.254,27.06 R122.2@26.416,28.222 ; v1(54.29,22.75) 55.11,23.57 55.361,23.57 55.51,23.719 55.51,27.83 55.97,28.29 62.75,28.29 66.05,31.59 66.05,36.85 v1(65.98,36.92) ; v1(112.52,44.54) 113.5,45.52 114.755,45.52 114.904,45.669 U15.26@114.904,48.765
  Bottom Layer w0.254: v1(23.47,20.77) 24.72,20.77 25.93,21.98 44.63,21.98 45.39,22.74 54.24,22.74 v1@54.25,22.75 ; v1(65.98,36.92) 67.934,36.92 69.75,35.103 71.216,35.103 71.352,35.24 72.461,35.24 72.61,35.389 72.61,40.011 73.674,41.076 75.188,41.076 76.469,42.357 76.469,53.749 77.75,55.03 84.79,55.03 93.59,46.23 110.72,46.23 v1@112.362,44.588
NetQ32_3: Q32.3 R132.2 U15.43 | length 127.9
  Top Layer w0.127: R132.2@43.561,28.222 45.842,28.222 v1@46.22,28.6 ; v1(46.27,31.46) 46.27,33.55 v1@46.31,33.59 ; v1(122.26,43.51) 124.46,43.51 v1(125.89,44.94) 125.89,46.13 125.06,46.96 123.95,46.96 123.404,47.506 U15.43@123.404,48.765
  Top Layer w0.254: Q32.3@43.519,24.239 43.561,24.281 R132.2@43.561,28.222
  Bottom Layer w0.127: v1(46.22,33.71) 50.89,33.71 53.42,31.18 53.42,29.77 57.2,25.99 57.2,20.78 61.01,16.97 92.3,16.97 98.71,23.38 98.71,37.08 99.07,37.44 100.82,37.44 101.22,37.84 108.16,37.84 113.82,43.5 v1@122.48,43.5 ; v1(46.26,28.39) v1@46.26,31.49
NetQ42_3: Q42.3 R142.2 U15.42 | length 135.7
  Top Layer w0.127: Q42.3@51.054,24.239 51.413,23.88 52.606,23.88 52.68,23.806 52.68,20.313 52.53,20.163 52.53,16.67 54.19,15.01 55.55,15.01 64.16,23.62 v1@67.17,23.62 ; v1(89.03,27.88) 112.71,27.88 112.99,27.6 112.99,22.62 113.86,21.75 118.23,21.75 118.99,22.51 118.99,37.36 119.5,37.87 130.81,37.87 v1@131.35,38.41 ; U15.42@122.904,48.765 122.904,46.906 123.314,46.906 123.68,46.54 124.396,46.54 124.69,46.246 v1(124.69,44.9)
  Top Layer w0.254: R142.2@49.65,28.155 49.75,28.155 51.054,26.851 Q42.3@51.054,24.239
  Bottom Layer w0.127: v1(67.23,23.62) 67.341,23.62 69.331,25.609 86.829,25.609 v1@89.12,27.9 ; v1(124.69,44.9) 124.69,43.38 124.86,43.21 127.68,43.21 128.97,41.92 128.97,40.73 v1(131.31,38.39)
NetQ52_3: Q52.3 R152.2 U15.41 | length 173.6
  Top Layer w0.127: v1@122.425,44.955 U15.41@122.425,48.744
  Top Layer w0.254: Q52.3@13.293,43.67 13.377,43.755 R152.2@13.377,47.893 v1@15.783,47.893 ; v1(14.91,52.29) 25.675,52.29 26.035,52.65 v1(26.31,52.65) ; v1(55.56,41.42) 55.65,41.33 61.362,41.33 v1@61.442,41.25 ; v1(93.27,39.36) 98.39,39.36 98.57,39.18 98.57,39.068 98.93,38.708 v1(98.93,38.56) ; U15.41@122.404,48.765 U15.41@122.425,48.744 ; v1@122.425,44.955 v1(122.52,44.86)
  Bottom Layer w0.254: v1@14.98,52.14 15.8,51.32 v1(15.8,47.9) ; v1(26.31,52.65) 26.31,50.419 26.459,50.27 32.35,50.27 33.66,51.58 46.12,51.58 48.11,49.59 48.11,41.35 48.57,40.89 51.203,40.89 51.733,41.42 v1(55.56,41.42) ; v1(61.6,41.24) 63.75,41.24 64.018,40.972 64.018,22.211 64.739,21.49 90.15,21.49 93.43,24.77 93.43,39.2 v1(93.27,39.36) ; v1(98.93,38.56) 98.95,38.54 108.02,38.54 114.34,44.86 v1(122.52,44.86)
NetQ62_3: Q62.3 R162.2 | length 6.6
  Top Layer w0.254: Q62.3@28.448,24.239 28.448,24.353 29.096,25.001 30.081,25.001 30.23,25.15 30.23,25.19 32.726,27.686 32.726,27.774 33.174,28.222 R162.2@33.262,28.222
NetQ72_3: Q72.3 R252.2 | length 5.2
  Top Layer w0.254: Q72.3@35.983,24.239 35.983,24.514 37.369,25.9 37.83,25.9 38.354,26.424 R252.2@38.354,28.222
NetQ82_3: Q82.3 R262.2 | length 5.6
  Top Layer w0.254: Q82.3@5.842,24.239 6.989,24.239 8.128,25.378 R262.2@8.128,28.222
NetQ92_3: Q92.3 R272.2 | length 4.3
  Top Layer w0.254: Q92.3@5.461,43.67 5.588,43.797 R272.2@5.588,47.893
NetQ102_3: Q102.3 R282.2 | length 4.2
  Top Layer w0.254: Q102.3@21.124,43.67 21.124,47.851 R282.2@21.167,47.893
NetQ112_3: Q112.3 R292.2 U15.25 | length 151.1
  Top Layer w0.254: v1(26.39,48.27) 26.665,48.27 27.042,47.893 R292.2@28.956,47.893 Q112.3@28.956,43.67 ; v1(56.46,39.48) 56.48,39.46 61.392,39.46 61.642,39.71 v1(61.79,39.71) ; v1(109.58,43.56) 109.774,43.754 110.184,43.754 111.95,45.52 111.95,49.3 112.78,50.13 112.78,50.49 112.795,50.504 U15.25@113.154,50.504
  Bottom Layer w0.254: v1(26.39,48.27) 26.467,48.27 27.147,48.95 33.29,48.95 34.41,50.07 45.31,50.07 46.41,48.97 46.41,39.149 46.559,39 51.217,39 51.697,39.48 v1(56.46,39.48) ; v1(61.79,39.71) 62.91,38.59 62.91,20.269 63.269,19.91 91.14,19.91 95.21,23.98 95.21,40.27 100.3,45.36 109.431,45.36 109.58,45.211 v1(109.58,43.56)
NetR13_1: R13.1 U13.8 | length 23.9
  Top Layer w0.254: R13.1@78.085,83.81 v1@81.28,83.81 ; U13.8@78.511,92.167 U13.8@79.375,92.167 81.487,92.167 81.75,92.43 81.75,93.1 79.674,95.176 79.674,95.816 v1(79.53,95.96)
  Bottom Layer w0.254: v1@79.53,96.08 81.27,94.34 v1(81.27,83.85)
NetR15_1: R15.1 R25.1 U15.94 | length 22.8
  Top Layer w0.127: R25.1@113.468,80.902 113.36,80.794 113.36,79.47 115.23,77.6 v2(115.23,77.523) ; U15.94@117.904,64.265 117.904,67.174 118.66,67.93 118.66,69.89 v2(118.61,69.94)
  Top Layer w0.254: R15.1@110.674,82.652 111.718,82.652 112.92,81.45 112.92,81.35 113.368,80.902 R25.1@113.468,80.902
  Bottom Layer w0.127: v2(115.23,77.523) 115.23,77.38 118.61,74 v2(118.61,69.94)
NetR25_2: R25.2 R45.2 | length 3.8
  Top Layer w0.254: R25.2@113.468,82.652 113.568,82.652 115.304,80.916 R45.2@116.516,80.916
NetR42_1: R42.1 S39.1 | length 58.7
  Top Layer w0.254: R42.1@41.427,9.196 43.91,6.713 43.91,5.189 44.059,5.04 v1@47.37,5.04
  Bottom Layer w0.254: v1@47.37,5.04 50.71,1.7 90.09,1.7 91.14,2.75 91.14,5.796 S39.1@92.202,6.858
  other v1: 47.37,5.19
NetR46_2: R46.2 U26.4 | length 3.5
  Top Layer w0.254: R46.2@117.729,91.518 117.829,91.518 119.585,89.762 119.889,89.762 119.983,89.668 U26.4@120.448,89.668
NetR52_1: R52.1 S29.1 | length 34.9
  Top Layer w0.254: R52.1@48.387,11.049 48.487,11.049 50.208,12.77 v1@50.23,12.77
  Bottom Layer w0.254: v1(50.29,12.81) 74.185,12.81 S29.1@80.137,6.858
NetR62_1: R62.1 S19.1 | length 81.6
  Top Layer w0.254: R62.1@14.351,28.222 14.351,27.187 15.058,26.48 v1(15.26,26.48) ; v1(44.48,2.17) 65.33,2.17 68.072,4.912 S19.1@68.072,6.858
  Bottom Layer w0.254: v1(15.26,26.48) 15.26,24.803 15.53,24.533 15.53,23.13 12.94,20.54 12.94,18.76 16.11,15.59 16.11,7.71 22.61,1.21 43.52,1.21 v1(44.48,2.17)
NetR65_2: R65.2 U15.63 | length 60.2
  Top Layer w0.254: R65.2@125.96,17.91 126.06,17.91 126.508,18.358 126.508,19.078 128.04,20.61 133.27,20.61 v1@134.37,19.51 ; U15.63@128.654,56.515 135.775,56.515 136.29,57.03 136.29,57.831 136.439,57.98 137.42,57.98 v1(137.49,57.91)
  Bottom Layer w0.254: v1(134.22,19.51) 134.22,41.24 137.61,44.63 137.61,57.488 137.594,57.504 137.594,57.806 v1(137.49,57.91)
NetR75_1: R75.1 U16.8 U26.8 U36.8 | length 126.9
  Top Layer w0.127: U16.8@103.67,91.801 104.127,91.801 105.526,93.2 v1@106.27,93.2 ; v1(123.89,79.42) 123.89,76.62 124.72,75.79 124.98,75.79 v1@125,75.81 ; v1(124.04,84.73) 124.11,84.66 125.74,84.66 126.41,85.33 126.41,91.08 125.872,91.618 U26.8@124.842,91.618 124.89,91.666 v1(124.89,93.52) ; R75.1@132.23,40.89 132.23,40.99 133.82,42.58 v1(133.82,42.64) ; U36.8@145.707,91.237 146.164,91.237 146.329,91.402 146.329,92.019 147.31,93 v1(148.84,93)
  Bottom Layer w0.127: v1(106.29,93.18) 106.471,93.18 106.701,92.95 114.37,92.95 114.905,93.485 114.905,94.665 115.15,94.91 123.73,94.91 124.74,93.9 ; v1@123.85,79.43 123.82,79.46 123.82,84.328 124.04,84.548 v1(124.04,84.73) ; v1(124.89,93.52) 124.9,93.53 132.86,93.53 135.39,96.06 140.82,96.06 141.43,95.45 141.43,94.5 142.77,93.16 148.74,93.16 v1@149.06,92.84 ; v1@125.089,75.691 v1(124.96,75.82) 126.4,75.82 126.68,76.1 126.68,77.346 126.754,77.42 131.32,77.42 131.97,76.77 131.97,76.18 132.55,75.6 135.96,75.6 136.28,75.28 136.28,45.06 133.92,42.7 v1@133.92,42.64
NetR75_2: R75.2 U15.30 | length 24.5
  Top Layer w0.254: U15.30@116.904,48.765 116.888,48.749 116.888,44.409 118.52,42.777 118.52,38.89 118.99,38.42 129.4,38.42 130.48,39.5 R75.2@130.48,40.89
NetR85_1: R85.1 U16.6 U26.6 U36.6 | length 196.6
  Top Layer w0.127: v2(90.76,77.31) 92.66,79.21 92.706,79.21 92.78,79.284 92.78,84.5 93.1,84.82 v2@98.36,84.82 ; v2@90.92,74.8 93.51,74.8 94.28,74.03 v2(94.28,72.29) ; v2(94.15,70.23) 94.15,70.1 94.87,69.38 100.494,69.38 100.7,69.174 100.7,67.49 99.97,66.76 94.994,66.76 94.92,66.686 94.92,47.44 95.42,46.94 95.42,43.414 95.494,43.34 95.56,43.34 102.51,36.39 v2(102.51,34.44) ; U16.6@103.67,90.501 103.828,90.343 104.465,90.343 105.11,89.698 105.11,88.02 106.7,86.43 ; v2(104.1,85.16) 105.37,86.43 106.7,86.43 ; v2@120.88,33.74 121.71,34.57 v2(136.02,34.57) ; R85.1@123.249,40.854 124.294,40.854 127.23,43.79 129.23,43.79 130.49,45.05 130.49,45.056 130.514,45.08 136.35,45.08 138.39,43.04 138.39,40.91 v2@137.6,40.12 ; U26.6@124.842,90.318 124.684,90.16 123.144,90.16 122.75,89.766 v1(122.75,86.43) 106.7,86.43 ; v1(144.26,88.28) 144.26,89.127 144.912,89.779 145.549,89.779 U36.6@145.707,89.937
  Bottom Layer w0.127: v2(90.88,74.75) 90.88,77.06 v2@90.93,77.11 ; v2(94.15,70.23) 94.24,70.32 94.24,72.3 v2@94.15,72.39 ; v2(98.38,84.99) 104.04,84.99 v2@104.07,85.02 ; v2@102.52,34.27 102.8,33.99 v2(120.86,33.99) ; v1(122.75,86.43) 122.813,86.493 142.633,86.493 v1@144.53,88.39 ; v2@136.19,34.51 137.55,35.87 v2(137.55,40.12)
NetR85_2: R85.2 U15.32 | length 8.9
  Top Layer w0.254: U15.32@117.904,48.765 117.904,44.856 121.062,41.698 121.062,41.4 R85.2@121.25,41.212
NetR92_2: R92.2 R102.1 U15.23 U16.5 | length 219.2
  Top Layer w0.127: v2@96.89,77.45 97.08,77.64 v2(97.08,82.83) ; v2@101.14,82.91 101.59,82.46 103.056,82.46 103.13,82.534 103.13,89.686 103.295,89.851 U16.5@103.67,89.851 ; v1(109.54,48.51) 109.54,50.07 110.97,51.5 112.538,51.5
  Top Layer w0.254: R102.1@28.084,9.196 R92.2@31.42,9.196 v1@31.42,6.27 ; v1(56.24,10.16) 56.24,13.97 56.79,14.52 v1@63.13,14.52 ; v1(82.3,13.45) 82.369,13.381 89.912,13.381 v1(89.981,13.312)
  Bottom Layer w0.127: v2(97.07,77.29) 97.07,75.88 97.85,75.1 100.97,75.1 101.49,74.58 101.49,56.53 100.81,55.85 100.1,55.85 99.33,55.08 99.33,48.26 100.46,47.13 108.16,47.13 v1(109.54,48.51) ; v2(97.08,82.83) 97.085,82.835 101.125,82.835 v2(101.13,82.84)
  Bottom Layer w0.254: v1(31.43,5.89) 31.43,3.85 32.09,3.19 37.93,3.19 39.14,4.4 41.12,4.4 41.66,4.94 43.13,4.94 44.82,6.63 55.032,6.63 56.27,7.868 v1@56.27,9.96 ; v1(63.21,14.48) 81.25,14.48 v1@82.37,13.36 ; v1(89.981,13.312) 94.472,13.312 95.9,14.74 95.9,18.46 100.07,22.63 100.07,35.05 101.91,36.89 108.71,36.89 114.2,42.38 123.11,42.38 123.81,43.08 123.81,45.884 123.661,46.033 111.997,46.033 v1@109.66,48.37
NetR95_1: R95.1 U16.7 U26.7 U36.7 | length 130.2
  Top Layer w0.127: U16.7@103.67,91.151 103.828,90.993 104.547,90.993 105.8,89.74 105.8,88.33 106.76,87.37 119.627,87.37 v1(119.7,87.443) ; v1@119.7,87.38 119.805,87.38 122.283,87.407 122.37,87.494 122.37,90.06 123.278,90.968 U26.7@124.842,90.968 ; R95.1@127.849,40.854 127.849,42.409 128.68,43.24 130.166,43.24 130.24,43.314 130.24,43.57 131.36,44.69 134.68,44.69 137.36,42.01 v2@137.63,42.01 ; v1(143.49,90.72) 145.574,90.72 U36.7@145.707,90.587
  Bottom Layer w0.127: v1(119.7,87.443) 122.79,87.443 cw(c122.79,86.63) 122.793,87.443 141.875,87.37 141.98,87.37 142.017,87.407 142.65,88.04 142.65,90.29 142.772,90.412 143,90.412 143.308,90.72 v1(143.49,90.72) 144.482,89.728 146.747,89.728 147.61,88.866 147.61,87.51 146.94,86.84 145.7,86.84 145.06,86.2 145.06,83.92 143.67,82.53 143.67,79.06 145.06,77.67 145.06,77.06 143.42,75.42 139.574,75.42 139.5,75.346 139.5,71.35 136.873,68.723 136.873,61.457 138.5,59.83 138.5,44.59 137.37,43.46 v2(137.37,42.11)
NetR95_2: R95.2 U15.31 | length 17.4
  Top Layer w0.254: U15.31@117.396,48.24 117.396,44.646 119.05,42.992 119.05,40.16 119.99,39.22 124.32,39.22 124.62,39.52 124.62,40.4 125.074,40.854 R95.2@126.099,40.854
NetR105_1: R105.1 U17.7 U27.7 | length 56.9
  Top Layer w0.127: R105.1@141.718,56.388 141.718,57.748 141.97,58 144.95,58 145.65,58.7 v1(145.65,62.49)
  Top Layer w0.254: U17.7@131.178,82.285 131.642,82.285 132.61,83.253 132.61,84.764 132.759,84.913 148.111,84.913 148.26,84.764 v1(148.26,83.98) 148.26,82.87 147.675,82.285 U27.7@145.91,82.285
  Bottom Layer w0.127: v1@145.764,62.43 144.914,62.43 144.84,62.504 144.84,69.87 145.34,70.37 145.34,75.45 148.26,78.37 v1(148.26,83.98)
NetR105_2: R105.2 U15.53 | length 15.8
  Top Layer w0.127: U15.53@128.654,51.515 128.709,51.57 v1@133.135,51.57 ; v1(133.18,55.44) 133.63,55.89 139.57,55.89 139.968,56.288 R105.2@139.968,56.388
  Bottom Layer w0.127: v1(133.18,51.56) v1(133.18,55.44) 133.18,55.59 v1@133.23,55.64
NetR115_2: R115.2 U15.52 | length 12
  Top Layer w0.127: U15.52@128.654,51.015 130.345,51.015 132.09,49.27 139.708,49.27 R115.2@139.841,49.403
NetR125_2: R125.2 U15.54 | length 11.6
  Top Layer w0.127: U15.54@128.654,52.015 128.738,52.099 129.36,52.099 129.935,52.674 R125.2@139.966,52.674
NetR222_2: R222.2 R232.1 U15.24 U16.4 | length 171.3
  Top Layer w0.254: R232.1@44.682,35.079 R222.2@47.695,35.079 47.695,35.179 50.076,37.56 55.604,37.56 55.984,37.18 v1(61.66,37.18) ; U16.4@99.276,89.851 99.276,86.804 99.77,86.31 v1@99.77,76.94 ; v1@102.35,41.4 v1(102.35,47.95) ; v1(107.81,44.04) 110.71,46.94 110.71,50.02 111.59,50.9 112.327,50.9 112.422,50.994 112.564,50.994 112.581,51.012 113.151,51.012 U15.24@113.154,51.015
  Bottom Layer w0.254: v1(61.66,37.18) 61.66,28.111 61.5,27.951 61.5,19.03 62.8,17.73 91.85,17.73 97.53,23.41 97.53,39.48 102.05,44 v1@107.77,44 ; v1(99.76,76.82) 101.43,76.82 102.29,75.96 102.29,48.01 v1(102.35,47.95) ; v1(102.35,41.32) 103.73,42.7 107.26,42.7 107.616,43.056 107.616,43.846 v1@107.77,44 ; v1@107.81,44 v1@107.88,44 ; v1(107.81,44.04) v1@107.77,44
NetU13_1: U13.1 U15.96 | length 94
  Top Layer w0.254: U13.1@74.549,92.167 75.298,92.167 75.45,92.319 75.55,92.319 75.55,94.1 74.77,94.88 v1@74.74,94.88 ; v1(115.59,70.06) 116.896,68.754 116.896,64.653 U15.96@116.883,64.64
  Bottom Layer w0.254: v1(74.63,95.07) 67.139,95.07 66.99,94.921 66.99,91.99 64.83,89.83 64.83,87.89 62,85.06 62,80.02 63.67,78.35 101.81,78.35 103.88,76.28 112.15,76.28 115.64,72.79 115.64,70.11 v1(115.59,70.06)
NetU13_4: U13.4 U15.95 | length 82
  Top Layer w0.254: v1@69.96,86.74 71.24,86.74 72.857,88.357 U13.4@74.549,88.357 ; v1(117.39,70.02) 117.404,70.006 U15.95@117.404,64.265
  Bottom Layer w0.254: v1(70.13,86.73) 65.59,86.73 63.56,84.7 63.56,81.4 64.75,80.21 102.23,80.21 104.99,77.45 112.93,77.45 117.39,72.99 v1(117.39,70.02)
NetU15_15: U15.15 U27.6 | length 73.1
  Top Layer w0.127: v1(104.9,52.12) 104.905,52.12 105.365,52.58 107.37,52.58 110.305,55.515 U15.15@113.154,55.515 ; v2(133.86,67.45) 138.273,67.45 138.76,67.937 v3@138.76,67.99 ; v2(144.49,81.05) 145.875,81.05 U27.6@145.91,81.015
  Bottom Layer w0.127: v1(104.9,52.12) 104.014,52.12 103.94,52.194 103.94,54.34 104.34,54.74 109.23,54.74 110.96,53.01 112.84,53.01 113.49,53.66 113.49,54.33 126.67,67.51 133.8,67.51 v2(133.86,67.45) ; v3(138.99,67.9) 141.98,70.89 141.98,73 145.75,76.77 145.75,78.45 144.49,79.71 v2(144.49,81.05)
NetU15_16: U15.16 U17.6 | length 62.4
  Top Layer w0.127: v1(106.94,51.76) 107.024,51.844 107.594,51.844 110.765,55.015 U15.16@113.154,55.015 ; v2(130.68,75.77) 130.68,76.933 130.82,77.073 130.82,78.08 129.68,79.22 129.68,80.29 130.202,80.812 130.975,80.812 U17.6@131.178,81.015
  Bottom Layer w0.127: v1(106.94,51.76) 106.39,51.21 103.445,51.21 103.043,51.613 103.08,51.65 103.08,56.23 104.08,57.23 105.54,57.23 111.38,63.07 119.81,63.07 125.65,68.91 129.44,68.91 130.78,70.25 130.78,75.67 v2(130.68,75.77)
NetU15_17: U15.17 U36.1 | length 56.1
  Top Layer w0.127: U15.17@113.154,54.515 113.238,54.599 113.86,54.599 114.61,55.349 114.61,56.9 v2@114.63,56.92 ; v2(134.83,72.57) 136.78,74.52 136.78,75.4 138.23,76.85 141.12,76.85 141.485,77.215 141.485,78.495 141.71,78.72 141.71,80.67 143.22,82.18 v2(143.22,83.16) ; U36.1@141.313,91.237 142.183,91.237 142.677,90.743 142.677,90.021 143.33,89.367 143.33,86.72 144.29,85.76 v2(144.29,85.74)
  Bottom Layer w0.127: v2(114.58,56.94) 125.96,68.32 130.16,68.32 134.43,72.59 v2@134.75,72.59 ; v2(143.22,83.16) 143.22,84.67 v2(144.29,85.74)
NetU15_18: U15.18 U26.1 | length 90.6
  Top Layer w0.127: U15.18@113.154,54.015 114.055,54.015 v2@114.64,53.43 ; v2(113.89,85.63) 114.33,85.19 v2(117.91,85.19) ; v2(119.21,77.64) 120.52,78.95 121.186,78.95 121.49,79.254 v2(121.49,82.6) ; U26.1@120.448,91.618 120.905,91.618 121.07,91.783 121.07,93.14 v2@121.71,93.78
  Bottom Layer w0.127: v2@113.65,85.5 117.09,88.94 121.18,88.94 121.82,89.58 v2(121.82,93.55) ; v2(114.55,53.58) 126.47,65.5 126.47,66.2 127.24,66.97 133.26,66.97 133.544,66.687 134.327,66.687 134.34,66.7 135.11,66.7 135.24,66.83 135.24,69.98 135.76,70.5 135.76,73.65 134.63,74.78 131.99,74.78 131.53,75.24 131.53,76.23 130.8,76.96 127.6,76.96 127.28,76.64 127.28,75.04 127.18,74.94 124.08,74.94 123.36,75.66 123.36,77.14 122.89,77.61 119.24,77.61 v2(119.21,77.64) ; v2@117.95,85.24 120.34,85.24 121.49,84.09 v2(121.49,82.6)
NetU15_33: U15.33 U16.1 | length 151
  Top Layer w0.127: v2(93.97,83.13) 93.97,77.65 94.38,77.24 v2(94.48,77.24) ; v2(96.48,47.91) 96.48,43.59 108.99,31.08 114.09,31.08 114.58,30.59 114.58,23.64 114.98,23.24 116.48,23.24 116.65,23.41 v2@116.65,35.45 ; U15.33@118.404,48.765 118.404,47.446 v2(118.99,46.86)
  Top Layer w0.254: U16.1@99.276,91.801 99.37,91.707 100.097,91.707 101.63,90.174 v2@101.63,86.35
  Bottom Layer w0.127: v2@93.74,83 94.99,84.25 94.99,84.8 95.01,84.82 95.01,86.146 95.084,86.22 v2(101.59,86.22) ; v2(94.48,77.24) 94.48,76 94.73,75.75 96.3,75.75 97.66,74.39 100.1,74.39 100.52,73.97 100.52,56.98 99.99,56.45 99.41,56.45 98.39,55.43 98.39,49.9 v2@96.36,47.87 ; v2(116.6,35.52) 117.74,36.66 132.86,36.66 133.45,37.25 133.45,41.56 132.74,42.27 132.74,45.14 131.01,46.87 119,46.87 v2(118.99,46.86)
VBAT: C11.1 C21.1 J18.2 R32.1 U11.1 U21.1 | length 264.2
  Top Layer w0.254: C11.1@4.191,92.405 9.95,86.646 9.95,75.82 11.29,74.48 12.65,74.48 12.827,74.657 U11.1@12.827,77.724 ; v1(24.61,5.85) 24.61,9.058 R32.1@24.748,9.196 ; C21.1@26.416,82.398 28.252,82.398 30.93,79.72 30.93,76.23 32.85,74.31 34.63,74.31 35.077,74.757 U21.1@35.077,77.699 ; v1(42.15,3.55) 42.158,3.558 43.058,3.558 43.56,4.06 54.99,4.06 57.92,6.99 57.92,10.57 59.69,12.34 66.26,12.34 69.286,15.366 v1(69.41,32.1) 69.41,32.31 65.039,43.941 64.89,44.09 60.099,44.09 59.989,43.98 v1(55.05,43.98) ; J18.2@78.483,40.873 78.512,40.902 85.312,40.902 v1(85.34,40.93)
  Bottom Layer w0.254: C11.1@4.191,92.405 6.805,92.405 11.2,88.01 11.2,83.91 12.712,82.398 C21.1@26.416,82.398 28.45,80.364 28.45,71.93 30.23,70.15 47.62,70.15 49.81,67.96 49.81,44.239 50.069,43.98 v1(55.05,43.98) ; v1(24.61,5.85) 27.5,5.85 30.96,2.39 39.51,2.39 40.67,3.55 v1(42.15,3.55) ; v1(69.41,32.1) 85.95,32.1 86.43,32.58 86.43,39.84 v1(85.34,40.93)